# EAGLE board mixer1 (EAGLE 7.3.0)
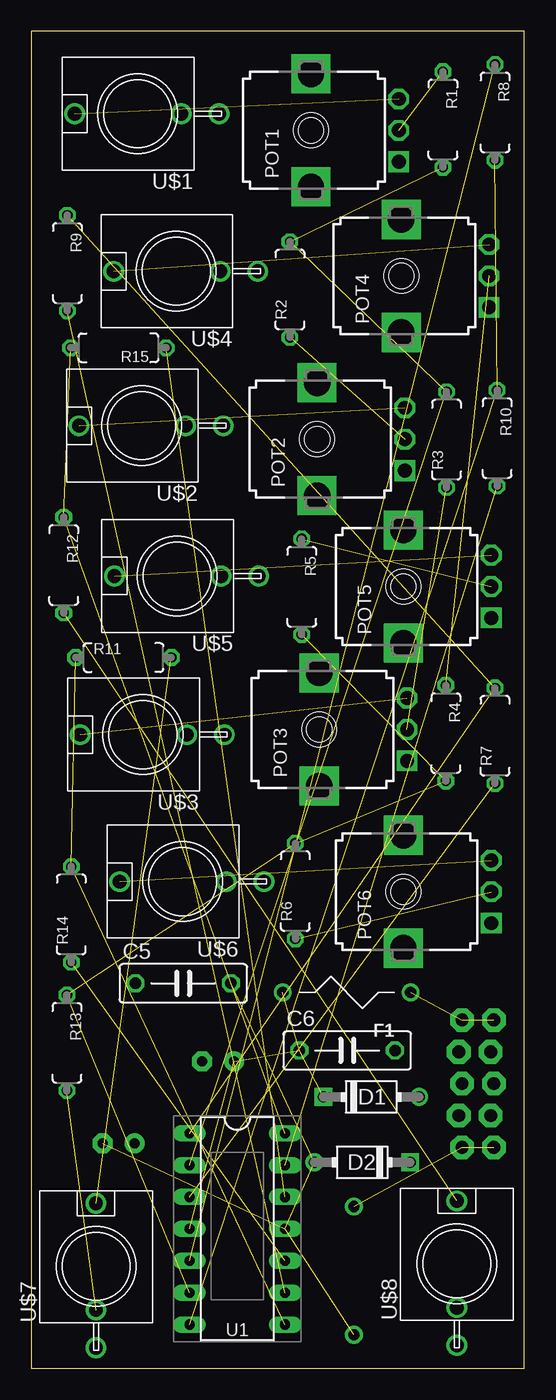
[diagram p0: board, top side]
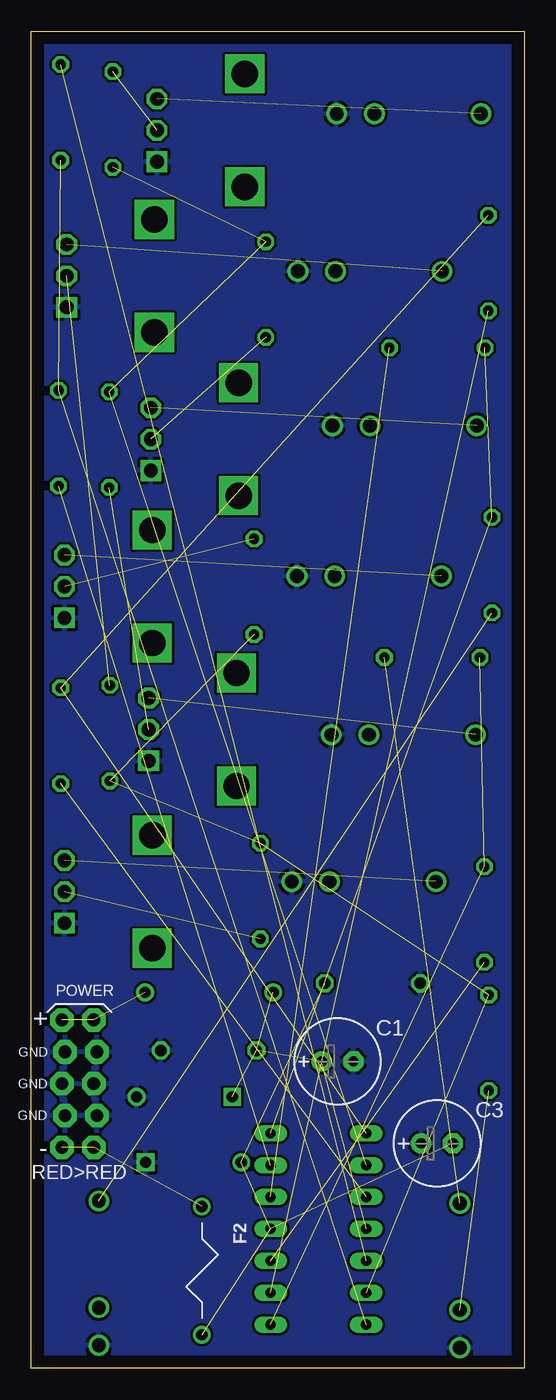
[diagram p1: board, bottom side, seen from below]

Size 39.3 x 106.5 mm. Coordinates in mm from the lower left corner, seen from the top.
Outline: 0,0 39.3,0 39.3,106.5 0,106.5 0,0
Copper layers (1*16): Top 0.035mm / dielectric 1.5mm / Bottom 0.035mm
Design rules "default": minimum track width 10mil, minimum drill 24mil, track to track 8mil, track to pad 8mil, pad to pad 8mil, via to via 8mil, smd to smd 8mil, copper to edge 40mil, drill to drill 8mil, minimum pad ring 10mil, minimum via ring 8mil, stop-mask expansion 4mil, vias tented up to drill 0mil, thermal gap 10mil

## Footprints (pad centres in the part's own frame; a part is rotated, then mirrored left to right if it is on the bottom)
E2,5-7 = drill 0.813 pad 1.6: + -1.27,0 | drill 0.813 pad 1.6 octagon: - 1.27,0
C075-032X103 = drill 0.914 octagon: 1 -3.81,0; 2 3.81,0
DO41-3 = drill 0.9: A 3.81,0 | drill 0.9 square: C -3.81,0
BOURNS-MF-R = drill 0.9: P$1 -5.105,0; P$2 5.105,0
9MM_SNAP-IN_POT = drill 1.1 square: 1 -2.5,-7 | drill 1.1 octagon: 2 0,-7; 3 2.5,-7 | drill 2.1 square: CHASSIS1 -4.5,0; CHASSIS2 4.5,0
7MM_RESISTOR = drill 0.813 octagon: 1 -3.81,0; 2 3.81,0
EURO_PWR_HEADER_LOCK = drill 1.016 pad 1.88 octagon: GND1 -2.54,1.143; GND2 -2.54,-1.397; GND3 0,1.397; GND4 0,-1.143; GND5 2.54,1.143; GND6 2.54,-1.397; NEG1 -5.08,1.397; NEG2 -5.08,-1.143; POS1 5.08,1.397; POS2 5.08,-1.143
DIL14 = drill 0.813 long: 1 -7.62,-3.81; 2 -5.08,-3.81; 3 -2.54,-3.81; 4 0,-3.81; 5 2.54,-3.81; 6 5.08,-3.81; 7 7.62,-3.81; 8 7.62,3.81; 9 5.08,3.81; 10 2.54,3.81; 11 0,3.81; 12 -2.54,3.81; 13 -5.08,3.81; 14 -7.62,3.81
WQP-PJ301M-12_JACK = drill 1.1: P$1_TIP 0,5; P$2_SWITCH 0,-3.5; P$3_SLEEVE 0,-6.5

## Placement (x,y rotation side)
C1  10uF  [E2,5-7]  14.89,24.43 0 bottom
C3  10uF  [E2,5-7]  6.96,17.9 0 bottom
C5  100nF  [C075-032X103]  12.1,30.66 0 top
C6  100nF  [C075-032X103]  25.17,25.31 0 top
D1  1N4007  [DO41-3]  27.09,21.61 0 top
D2  1N4007  [DO41-3]  26.38,16.4 180 top
F1  MF-R500+  [BOURNS-MF-R]  25.13,29.94 180 top
F2  MF-R500+  [BOURNS-MF-R]  25.71,7.77 270 bottom
POT1  A100K  [9MM_SNAP-IN_POT]  22.29,98.62 90 top
POT2  A100K  [9MM_SNAP-IN_POT]  22.78,74.01 90 top
POT3  A100K  [9MM_SNAP-IN_POT]  22.95,50.88 90 top
POT4  A100K  [9MM_SNAP-IN_POT]  29.49,87.02 90 top
POT5  A100K  [9MM_SNAP-IN_POT]  29.66,62.27 90 top
POT6  A100K  [9MM_SNAP-IN_POT]  29.66,37.95 90 top
R1  100K  [7MM_RESISTOR]  32.81,99.48 270 top
R2  100K  [7MM_RESISTOR]  20.61,85.93 90 top
R3  100K  [7MM_RESISTOR]  33.09,73.97 90 top
R4  100K  [7MM_RESISTOR]  33.04,50.59 270 top
R5  100K  [7MM_RESISTOR]  21.55,62.26 270 top
R6  100K  [7MM_RESISTOR]  21.04,38 90 top
R7  100K  [7MM_RESISTOR]  36.96,50.38 90 top
R8  100K  [7MM_RESISTOR]  36.96,100.05 270 top
R9  100K  [7MM_RESISTOR]  2.87,88.04 270 top
R10  100K  [7MM_RESISTOR]  37.13,74.1 270 top
R11  1K  [7MM_RESISTOR]  7.35,56.62 0 top
R12  1K  [7MM_RESISTOR]  2.58,63.98 270 top
R13  100K  [7MM_RESISTOR]  2.84,25.92 270 top
R14  100K  [7MM_RESISTOR]  3.18,36.14 90 top
R15  100K  [7MM_RESISTOR]  6.95,81.29 180 top
SV1  EURO_POWER_HEADERLOCK_PADS  [EURO_PWR_HEADER_LOCK]  35.47,22.66 90 bottom
U1  TL074_  [DIL14]  16.42,11.09 270 top
U$1  THONKICONNNEW  [WQP-PJ301M-12_JACK]  8.46,99.94 90 top
U$2  THONKICONNNEW  [WQP-PJ301M-12_JACK]  8.8,75.08 90 top
U$3  THONKICONNNEW  [WQP-PJ301M-12_JACK]  8.89,50.47 90 top
U$4  THONKICONNNEW  [WQP-PJ301M-12_JACK]  11.55,87.39 90 top
U$5  THONKICONNNEW  [WQP-PJ301M-12_JACK]  11.62,63.11 90 top
U$6  THONKICONNNEW  [WQP-PJ301M-12_JACK]  12.04,38.76 90 top
U$7  THONKICONNNEW  [WQP-PJ301M-12_JACK]  5.15,8.12 0 top
U$8  THONKICONNNEW  [WQP-PJ301M-12_JACK]  33.92,8.32 0 top

## Library data of the parts
C1 C3 C5 C6 = resistor
D1 D2 = gm-diodes
F1 F2 = ptc-littlefuse
POT1-POT6 R1-R15 SV1 U1 U$1-U$8 = MusicThingModular

## Nets
+12V: C1.+ C6.1 D1.C F1.P$2 U1.4
-12V: C3.- C5.2 D2.A F2.P$2 U1.11
GND: C1.- C3.+ C5.1 C6.2 D1.A D2.C POT1.1 POT2.1 POT3.1 POT4.1 POT5.1 POT6.1 SV1.GND1 SV1.GND2 SV1.GND3 SV1.GND4 SV1.GND5 SV1.GND6 U$1.P$3_SLEEVE U$2.P$3_SLEEVE U$3.P$3_SLEEVE U$4.P$3_SLEEVE U$5.P$3_SLEEVE U$6.P$3_SLEEVE U$7.P$3_SLEEVE U$8.P$3_SLEEVE
N$1: POT2.3 U$2.P$1_TIP
N$2: POT2.2 R2.1
N$3: POT1.3 U$1.P$1_TIP
N$4: POT1.2 R1.1
N$5: POT3.3 U$3.P$1_TIP
N$6: POT3.2 R3.1
N$7: POT4.3 U$4.P$1_TIP
N$8: POT4.2 R4.1
N$9: POT5.3 U$5.P$1_TIP
N$10: POT5.2 R5.1
N$11: POT6.3 U$6.P$1_TIP
N$12: POT6.2 R6.1
N$13: R1.2 R2.2 R3.2 U1.2
N$14: R7.1 U1.3
N$15: R7.2 R9.1 U1.1
N$16: R9.2 U1.9
N$17: R14.1 U1.10
N$18: R11.2 U$7.P$1_TIP
N$19: R8.2 R10.1 U1.7
N$20: R8.1 U1.5
N$21: R15.1 U1.12
N$22: R12.1 R15.2 U1.14
N$23: R10.2 U1.13
N$24: R4.2 R5.2 R6.2 R13.1 U1.6
N$25: R11.1 R14.2 U1.8
N$26: R13.2 U$7.P$2_SWITCH
N$27: R12.2 U$8.P$1_TIP
N$31: F2.P$1 SV1.NEG1 SV1.NEG2
N$32: F1.P$1 SV1.POS1 SV1.POS2

## Tracks (layer width: path | path; a pad name or v marks a point on that pad's centre or on a via)
+12V  (4 unrouted)
-12V  (4 unrouted)
GND
  pour Bottom (isolate 0.012): -1.63,108.25 -1.22,-1.84 41.18,-1.84 41.18,0.2 41.18,108.46
N$1  (1 unrouted)
N$2  (1 unrouted)
N$3  (1 unrouted)
N$4  (1 unrouted)
N$5  (1 unrouted)
N$6  (1 unrouted)
N$7  (1 unrouted)
N$8  (1 unrouted)
N$9  (1 unrouted)
N$10  (1 unrouted)
N$11  (1 unrouted)
N$12  (1 unrouted)
N$13  (3 unrouted)
N$14  (1 unrouted)
N$15  (2 unrouted)
N$16  (1 unrouted)
N$17  (1 unrouted)
N$18  (1 unrouted)
N$19  (2 unrouted)
N$20  (1 unrouted)
N$21  (1 unrouted)
N$22  (2 unrouted)
N$23  (1 unrouted)
N$24  (4 unrouted)
N$25  (2 unrouted)
N$26  (1 unrouted)
N$27  (1 unrouted)
N$31  (2 unrouted)
N$32  (2 unrouted)